# Altium PCB zh2.PcbDoc
Units mil, origin at the board's own origin, x right, y up, seen from the top; angles counter-clockwise.
Board outline 2690 x 1184 mil, 2 copper layers (Top Layer, Bottom Layer); 6 components, 50 nets, 104 pads, 20 vias.
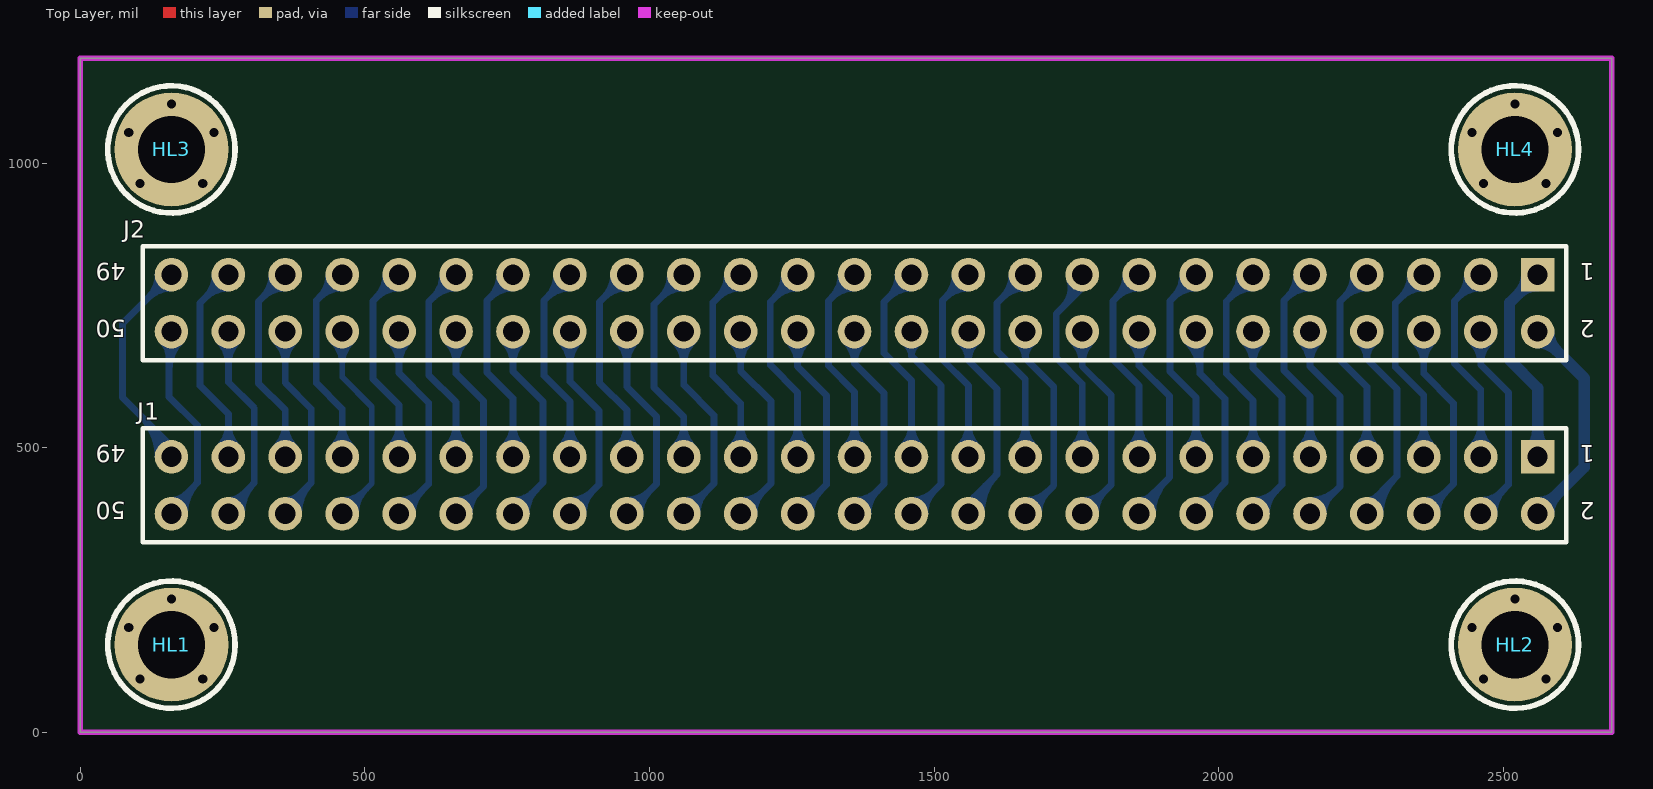
[diagram p0: Top Layer view]
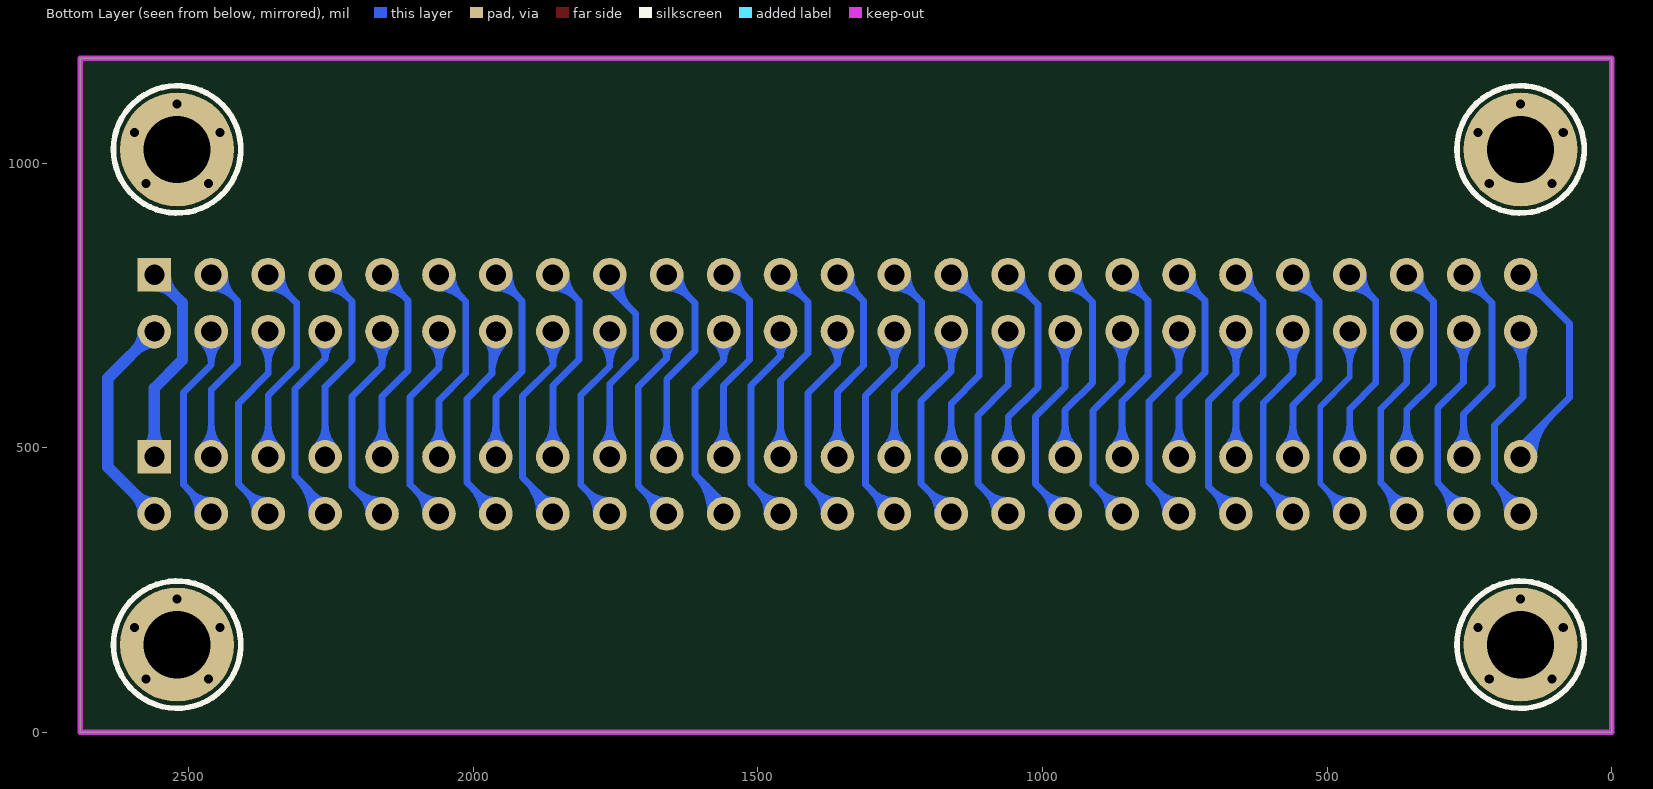
[diagram p1: Bottom Layer view, seen from below]

## Layer stack, top to bottom
Top Layer: signal copper 1.4
Dielectric: dielectric 12.6, FR-4, Dk 4.8
Bottom Layer: signal copper 1.4

## Board outline
0,0 2690,0 2690,1184 0,1184

## Design rules (kind name [scope] priority, off if disabled: settings)
Clearance [All] p1: gap=10
ComponentClearance [All] p1: gap=10 collisioncheckmode=3 verticalgap=10
PolygonConnect [All] p1: connectstyle=Relief reliefconductorwidth=10 reliefentries=4 polygonreliefangle="90 Angle"
RoutingVias [All] p1: holewidth=28 width=50 viastyle="Through Hole" minholewidth=28 minwidth=50 maxholewidth=28 maxwidth=50
SolderMaskExpansion [All] p1: expansion=4
TestPointUsage [All] p1: valid=0 allowmultiple=FALSE
Testpoint [All] p1: side=15 testpointundercomponent=TRUE minsize=40 maxsize=100 preferedsize=60 minholesize=0 maxholesize=40 preferedholesize=32 testpointgrid=1 style=1023 order=0123456789
Width [All] p1: maxlimit=20 minlimit=10 preferedwidth=20
18 further rules are at their usual default settings.

## Components (designator, comment, footprint, x,y, rotation, side; value= is the part's Value field where it differs from the comment)
HL1 "M3" JX002-HOLE-M3 160,154 r0 top
HL2 "M3" JX002-HOLE-M3 2520,154 r0 top
HL3 "M3" JX002-HOLE-M3 160,1024 r0 top
HL4 "M3" JX002-HOLE-M3 2520,1024 r0 top
J1 "2X25/DIP2.54" J089-HDR2X25-DIP2.54MM 2560,484 r180 top
J2 "2X25/DIP2.54" J089-HDR2X25-DIP2.54MM 2560,804 r180 top

## Footprints (in the part's own frame and the unit in brackets; to place one, negate y for a bottom-side part, rotate by r counter-clockwise, add the part's x,y. Pads: shape width x height; smd on the part's side, far side on the other; paste and mask are expansions set on the pad)
J089-HDR2X25-DIP2.54MM [mm] "Connector; Header; 25x2 Position"
  rect 1.5x1.5 hole 0.9: 1(0,0)
  round 1.5 hole 0.9: 2(0,2.54) 3(2.54,0) 4(2.54,2.54) 5(5.08,0) 6(5.08,2.54) 7(7.62,0) 8(7.62,2.54) 9(10.16,0) 10(10.16,2.54) 11(12.7,0) 12(12.7,2.54) 13(15.24,0) 14(15.24,2.54) 15(17.78,0) 16(17.78,2.54) 17(20.32,0) 18(20.32,2.54) 19(22.86,0) 20(22.86,2.54) 21(25.4,0) 22(25.4,2.54) 23(27.94,0) 24(27.94,2.54) 25(30.48,0) 26(30.48,2.54) 27(33.02,0) 28(33.02,2.54) 29(35.56,0) 30(35.56,2.54) 31(38.1,0) 32(38.1,2.54) 33(40.64,0) 34(40.64,2.54) 35(43.18,0) 36(43.18,2.54) 37(45.72,0) 38(45.72,2.54) 39(48.26,0) 40(48.26,2.54) 41(50.8,0) 42(50.8,2.54) 43(53.34,0) 44(53.34,2.54) 45(55.88,0) 46(55.88,2.54) 47(58.42,0) 48(58.42,2.54) 49(60.96,0) 50(60.96,2.54)
  silkscreen extent -1.27,-1.27 62.23,3.81
JX002-HOLE-M3 [mm] "安装孔"
  round 5.08 hole 3: 0(0,0)
  silkscreen extent -2.84,-2.84 2.84,2.84

## Part data
HL1 HL2 HL3 HL4: library part JX002-HOLE-M3, "安装孔"
J1 J2: library part J089-HDR2X25-2.54mm-DIP, "双排直针"

## Via types
v1: diameter 25, hole 16, Top Layer to Bottom Layer, 20 vias

## Nets (pads, with @x,y where several pads share a name; then routed paths per layer and width w, separated by ;. In a path a pad name is that pad's centre, name@x,y a point inside that pad or via, vN(x,y) a via of type N, cw(c..) or ccw(c..) an arc to the next point about the centre after c; other vN are vias at no path point)
3: J1.3 J2.3 | length 536.6
  Bottom Layer w12: J2.3@2436.47,804 cw(c2379.67,804) 2419.84,763.84 cw(c2460,723.67) J2.3@2460,780.47 ; J1.3@2443.36,500.64 ccw(c2403.2,540.8) 2460,540.8 ccw(c2516.8,540.8) J1.3@2476.64,500.64 ; J1.3 2460,602 2414,648 2414,758 J2.3
4: J1.4 J2.4 | length 564.7
  Bottom Layer w12: J2.4@2443.36,687.36 cw(c2403.2,647.2) 2460,647.2 cw(c2516.8,647.2) J2.4@2476.64,687.36 ; J1.4 2460,386 2509,435 2509,597 2460,646 J2.4 ; J1.4@2460,407.53 ccw(c2460,459.5) 2496.75,422.75 ; J1.4@2471.53,384 cw(c2504.19,384) 2481.09,407.09 ; J1.4@2483.53,384 cw(c2545.16,384) 2501.58,427.58
5: J1.5 J2.5 | length 539.9
  Bottom Layer w12: J2.5@2336.47,804 cw(c2279.67,804) 2319.84,763.84 cw(c2360,723.67) J2.5@2360,780.47 ; J1.5@2343.36,500.64 ccw(c2303.2,540.8) 2360,540.8 ccw(c2416.8,540.8) J1.5@2376.64,500.64 ; J1.5 2360,592 2310,642 2310,754 J2.5
6: J1.6 J2.6 | length 541.5
  Bottom Layer w12: J2.6@2343.36,687.36 cw(c2303.2,647.2) 2360,647.2 cw(c2416.8,647.2) J2.6@2376.64,687.36 ; J1.6 2412,436 2412,578 2360,630 J2.6 ; J1.6@2360,407.53 ccw(c2360,464.33) 2400.16,424.16 ccw(c2440.33,384) J1.6@2383.53,384
7: J1.7 J2.7 | length 537.4
  Bottom Layer w12: J2.7@2236.47,804 cw(c2179.67,804) 2219.84,763.84 cw(c2260,723.67) J2.7@2260,780.47 ; J1.7@2243.36,500.64 ccw(c2203.2,540.8) 2260,540.8 ccw(c2316.8,540.8) J1.7@2276.64,500.64 ; J1.7 2260,607 2213,654 2213,757 J2.7
8: J1.8 J2.8 | length 567.4
  Bottom Layer w12: J2.8@2245.59,685.4 cw(c2222.8,656) 2260,656 ; J1.8 2260,397 2313,450 2313,603 2260,656 ; J1.8@2260,407.53 ccw(c2260,432.94) 2277.97,414.97 ; J2.8 2260,656 ; J1.8@2271.53,384 cw(c2330.74,384) 2288.87,425.87 ; J2.8@2274.41,685.4 ccw(c2297.2,656) 2260,656 ; J1.8@2283.53,384 cw(c2371.71,384) 2309.36,446.36
9: J1.9 J2.9 | length 536.2
  Bottom Layer w12: J2.9@2136.47,804 cw(c2079.67,804) 2119.84,763.84 cw(c2160,723.67) J2.9@2160,780.47 ; J1.9@2143.36,500.64 ccw(c2103.2,540.8) 2160,540.8 ccw(c2216.8,540.8) J1.9@2176.64,500.64 ; J1.9 2160,590 2114.47,635.53 2114.47,758.47 J2.9
10: J1.10 J2.10 | length 576.6
  Bottom Layer w12: J2.10@2143.36,687.36 cw(c2103.2,647.2) 2160,647.2 cw(c2216.8,647.2) J2.10@2176.64,687.36 ; J1.10 2165,384 2213,432 2213,590 2160,643 J2.10 ; J1.10@2160,395.53 ccw(c2160,435.43) 2188.21,407.21 ; J1.10@2160,407.53 ccw(c2160,476.4) 2208.7,427.7 ; J1.10@2183.53,384 cw(c2228.26,384) 2196.63,415.63
11: J1.11 J2.11 | length 537.4
  Bottom Layer w12: J2.11@2036.47,804 cw(c1979.67,804) 2019.84,763.84 cw(c2060,723.67) J2.11@2060,780.47 ; J1.11@2043.36,500.64 ccw(c2003.2,540.8) 2060,540.8 ccw(c2116.8,540.8) J1.11@2076.64,500.64 ; J1.11 2060,583 2013,630 2013,757 J2.11
12: J1.12 J2.12 | length 540.7
  Bottom Layer w12: J2.12@2043.36,687.36 cw(c2003.2,647.2) 2060,647.2 cw(c2116.8,647.2) J2.12@2076.64,687.36 ; J1.12 2111,435 2111,589 2060,640 J2.12 ; J1.12@2060,407.53 ccw(c2060,464.33) 2100.16,424.16 ccw(c2140.33,384) J1.12@2083.53,384
13: J1.13 J2.13 | length 536.6
  Bottom Layer w12: J2.13@1936.47,804 cw(c1879.67,804) 1919.84,763.84 cw(c1960,723.67) J2.13@1960,780.47 ; J1.13@1943.36,500.64 ccw(c1903.2,540.8) 1960,540.8 ccw(c2016.8,540.8) J1.13@1976.64,500.64 ; J1.13 1960,588 1914,634 1914,758 J2.13
14: J1.14 J2.14 | length 610.8
  Bottom Layer w12: J2.14@1943.36,687.36 cw(c1886.3,630.3) 1967,630.3 ; J2.14@1951.85,695.85 cw(c1915.27,659.27) 1967,659.27 ; J1.14 1960,388 2011,439 2011,586 1967,630 1967,697 J2.14 ; J1.14@1960,407.53 ccw(c1960,454.67) 1993.34,421.34 ; 1967,664.1 cw(c1999.9,664.1) J2.14@1976.64,687.36 ; J1.14@1971.53,384 cw(c2009.01,384) 1982.51,410.51 ; J1.14@1983.53,384 cw(c2049.98,384) 2002.99,430.99
15: J1.15 J2.15 | length 536.6
  Bottom Layer w12: J2.15@1836.47,804 cw(c1779.67,804) 1819.84,763.84 cw(c1860,723.67) J2.15@1860,780.47 ; J1.15@1843.36,500.64 ccw(c1803.2,540.8) 1860,540.8 ccw(c1916.8,540.8) J1.15@1876.64,500.64 ; J1.15 1860,609 1814,655 1814,758 J2.15
16: J1.16 J2.16 | length 585.1
  Bottom Layer w12: J2.16@1843.36,687.36 cw(c1803.2,647.2) 1860,647.2 cw(c1916.8,647.2) J2.16@1876.64,687.36 ; J1.16 1860,395 1913,448 1913,591 1860,644 J2.16 ; J1.16@1860,407.53 ccw(c1860,437.77) 1881.39,416.39 ; J1.16@1871.53,384 cw(c1925.91,384) 1887.46,422.46 ; J1.16@1883.53,384 cw(c1966.88,384) 1907.94,442.94
17: J1.17 J2.17 | length 575.6
  Bottom Layer w12: 1725.97,746.97 ccw(c1691.71,781.24) J2.17@1737.68,796.56 ; 1739.7,760.7 ccw(c1712.31,788.1) J2.17@1749.06,800.35 ; J1.17@1743.36,500.64 ccw(c1703.2,540.8) 1760,540.8 ccw(c1816.8,540.8) J1.17@1776.64,500.64 ; 1753.43,774.43 ccw(c1732.9,794.97) J2.17@1760.45,804.15 ; J1.17 1760,611.89 1714.47,657.41 1714.47,735.47 1760,781 J2.17
18: J1.18 J2.18 | length 540.7
  Bottom Layer w12: J2.18@1743.36,687.36 cw(c1703.2,647.2) 1760,647.2 cw(c1816.8,647.2) J2.18@1776.64,687.36 ; J1.18 1811,435 1811,592 1760,643 J2.18 ; J1.18@1760,407.53 ccw(c1760,464.33) 1800.16,424.16 ccw(c1840.33,384) J1.18@1783.53,384
19: J1.19 J2.19 | length 539.9
  Bottom Layer w12: J2.19@1636.47,804 cw(c1579.67,804) 1619.84,763.84 cw(c1660,723.67) J2.19@1660,780.47 ; J1.19@1643.36,500.64 ccw(c1603.2,540.8) 1660,540.8 ccw(c1716.8,540.8) J1.19@1676.64,500.64 ; J1.19 1660,620 1610,670 1610,754 J2.19
20: J1.20 J2.20 | length 516
  Bottom Layer w12: J2.20@1645.9,685.16 cw(c1624.82,657) 1660,657 ; J1.20 1710,434 1710,607 1660,657 ; J1.20@1660,407.53 ccw(c1660,464.33) 1700.16,424.16 ccw(c1740.33,384) J1.20@1683.53,384 ; J2.20 1660,657 ; J2.20@1674.1,685.16 ccw(c1695.18,657) 1660,657
21: J1.21 J2.21 | length 536.2
  Bottom Layer w12: J2.21@1536.47,804 cw(c1479.67,804) 1519.84,763.84 cw(c1560,723.67) J2.21@1560,780.47 ; J1.21@1543.36,500.64 ccw(c1503.2,540.8) 1560,540.8 ccw(c1616.8,540.8) J1.21@1576.64,500.64 ; J1.21 1560,609 1514.47,654.53 1514.47,758.47 J2.21
22: J1.22 J2.22 | length 599.6
  Bottom Layer w12: J2.22@1544.73,686.1 cw(c1516.49,653) 1560,653 ; J1.22@1559.53,383.98 cw(c1600.03,385.7) 1571.37,414.37 ; J1.22 1560,403 1610,453 ; J2.22 1560,653 ; J1.22@1571.52,384.49 cw(c1637.09,387.27) 1590.68,433.68 ; J2.22@1575.27,686.1 ccw(c1603.51,653) 1560,653 ; J1.22@1583.51,385 cw(c1674.15,388.85) 1610,453 ; 1560,653 1610,603 1610,453
23: J1.23 J2.23 | length 538.2
  Bottom Layer w12: J2.23@1436.47,804 cw(c1379.67,804) 1419.84,763.84 cw(c1460,723.67) J2.23@1460,780.47 ; J1.23@1443.36,500.64 ccw(c1403.2,540.8) 1460,540.8 ccw(c1516.8,540.8) J1.23@1476.64,500.64 ; J1.23 1460,618 1412,666 1412,756 J2.23
24: J1.24 J2.24 | length 507.4
  Bottom Layer w12: J2.24@1447.31,684.19 cw(c1432.47,661) 1460,661 ; J1.24 1512,436 1512,609 1460,661 ; J1.24@1460,407.53 ccw(c1460,464.33) 1500.16,424.16 ccw(c1540.33,384) J1.24@1483.53,384 ; J2.24 1460,661 ; J2.24@1472.69,684.19 ccw(c1487.53,661) 1460,661
25: J1.25 J2.25 | length 536.6
  Bottom Layer w12: J2.25@1336.47,804 cw(c1279.67,804) 1319.84,763.84 cw(c1360,723.67) J2.25@1360,780.47 ; J1.25@1343.36,500.64 ccw(c1303.2,540.8) 1360,540.8 ccw(c1416.8,540.8) J1.25@1376.64,500.64 ; J1.25 1360,598 1314,644 1314,758 J2.25
26: J1.26 J2.26 | length 539.6
  Bottom Layer w12: J2.26@1343.53,687.2 cw(c1305.13,648) 1360,648 ; J1.26 1412,436 1412,596 1360,648 ; J1.26@1360,407.53 ccw(c1360,464.33) 1400.16,424.16 ccw(c1440.33,384) J1.26@1383.53,384 ; J2.26 1360,648 ; J2.26@1376.47,687.2 ccw(c1414.87,648) 1360,648
27: J1.27 J2.27 | length 538.2
  Bottom Layer w12: J2.27@1236.47,804 cw(c1179.67,804) 1219.84,763.84 cw(c1260,723.67) J2.27@1260,780.47 ; J1.27@1243.36,500.64 ccw(c1203.2,540.8) 1260,540.8 ccw(c1316.8,540.8) J1.27@1276.64,500.64 ; J1.27 1260,597 1212,645 1212,756 J2.27
28: J1.28 J2.28 | length 540.7
  Bottom Layer w12: J2.28@1243.36,687.36 cw(c1203.2,647.2) 1260,647.2 cw(c1316.8,647.2) J2.28@1276.64,687.36 ; J1.28 1311,435 1311,592 1260,643 J2.28 ; J1.28@1260,407.53 ccw(c1260,464.33) 1300.16,424.16 ccw(c1340.33,384) J1.28@1283.53,384
29: J1.29 J2.29 | length 539
  Bottom Layer w12: J2.29@1136.47,804 cw(c1079.67,804) 1119.84,763.84 cw(c1160,723.67) J2.29@1160,780.47 ; J1.29@1143.36,500.64 ccw(c1103.2,540.8) 1160,540.8 ccw(c1216.8,540.8) J1.29@1176.64,500.64 ; J1.29 1160,578 1111,627 1111,755 J2.29
30: J1.30 J2.30 | length 542.4
  Bottom Layer w12: J2.30@1143.36,687.36 cw(c1103.2,647.2) 1160,647.2 cw(c1216.8,647.2) J2.30@1176.64,687.36 ; J1.30 1213,437 1213,582 1160,635 J2.30 ; J1.30@1160,407.53 ccw(c1160,464.33) 1200.16,424.16 ccw(c1240.33,384) J1.30@1183.53,384
31: J1.31 J2.31 | length 541.5
  Bottom Layer w12: J2.31@1036.47,804 cw(c979.67,804) 1019.84,763.84 cw(c1060,723.67) J2.31@1060,780.47 ; J1.31@1043.36,500.64 ccw(c1003.2,540.8) 1060,540.8 ccw(c1116.8,540.8) J1.31@1076.64,500.64 ; J1.31 1060,554 1008,606 1008,752 J2.31
32: J1.32 J2.32 | length 542.4
  Bottom Layer w12: J2.32@1043.36,687.36 cw(c1003.2,647.2) 1060,647.2 cw(c1116.8,647.2) J2.32@1076.64,687.36 ; J1.32 1113,437 1113,557 1060,610 J2.32 ; J1.32@1060,407.53 ccw(c1060,464.33) 1100.16,424.16 ccw(c1140.33,384) J1.32@1083.53,384
33: J1.33 J2.33 | length 538.2
  Bottom Layer w12: J2.33@936.47,804 cw(c879.67,804) 919.84,763.84 cw(c960,723.67) J2.33@960,780.47 ; J1.33@943.36,500.64 ccw(c903.2,540.8) 960,540.8 ccw(c1016.8,540.8) J1.33@976.64,500.64 ; J1.33 960,566 912,614 912,756 J2.33
34: J1.34 J2.34 | length 541.5
  Bottom Layer w12: J2.34@943.36,687.36 cw(c903.2,647.2) 960,647.2 cw(c1016.8,647.2) J2.34@976.64,687.36 ; J1.34 1012,436 1012,555 960,607 J2.34 ; J1.34@960,407.53 ccw(c960,464.33) 1000.16,424.16 ccw(c1040.33,384) J1.34@983.53,384
35: J1.35 J2.35 | length 536.2
  Bottom Layer w12: J2.35@836.47,804 cw(c779.67,804) 819.84,763.84 cw(c860,723.67) J2.35@860,780.47 ; J1.35@843.36,500.64 ccw(c803.2,540.8) 860,540.8 ccw(c916.8,540.8) J1.35@876.64,500.64 ; J1.35 860,581 814.47,626.53 814.47,758.47 J2.35
36: J1.36 J2.36 | length 540.7
  Bottom Layer w12: J2.36@843.36,687.36 cw(c803.2,647.2) 860,647.2 cw(c916.8,647.2) J2.36@876.64,687.36 ; J1.36 911,435 911,565 860,616 J2.36 ; J1.36@860,407.53 ccw(c860,464.33) 900.16,424.16 ccw(c940.33,384) J1.36@883.53,384
37: J1.37 J2.37 | length 536.2
  Bottom Layer w12: J2.37@736.47,804 cw(c679.67,804) 719.84,763.84 cw(c760,723.67) J2.37@760,780.47 ; J1.37@743.36,500.64 ccw(c703.2,540.8) 760,540.8 ccw(c816.8,540.8) J1.37@776.64,500.64 ; J1.37 760,586.89 714.47,632.41 714.47,758.47 J2.37
38: J1.38 J2.38 | length 568
  Bottom Layer w12: J2.38@743.36,687.36 cw(c703.2,647.2) 760,647.2 cw(c816.8,647.2) J2.38@776.64,687.36 ; J1.38 760,386 813,439 813,581 760,634 J2.38 ; J1.38@760,407.53 ccw(c760,459.5) 796.75,422.75 ; J1.38@771.53,384 cw(c804.19,384) 781.09,407.09 ; J1.38@783.53,384 cw(c845.16,384) 801.58,427.58
39: J1.39 J2.39 | length 538.2
  Bottom Layer w12: J2.39@636.47,804 cw(c579.67,804) 619.84,763.84 cw(c660,723.67) J2.39@660,780.47 ; J1.39@643.36,500.64 ccw(c603.2,540.8) 660,540.8 ccw(c716.8,540.8) J1.39@676.64,500.64 ; J1.39 660,580 612,628 612,756 J2.39
40: J1.40 J2.40 | length 538.2
  Bottom Layer w12: J2.40@643.36,687.36 cw(c603.2,647.2) 660,647.2 cw(c716.8,647.2) J2.40@676.64,687.36 ; J1.40 708,432 708,582 660,630 J2.40 ; J1.40@660,407.53 ccw(c660,464.33) 700.16,424.16 ccw(c740.33,384) J1.40@683.53,384
41: J1.41 J2.41 | length 536.6
  Bottom Layer w12: J2.41@536.47,804 cw(c479.67,804) 519.84,763.84 cw(c560,723.67) J2.41@560,780.47 ; J1.41@543.36,500.64 ccw(c503.2,540.8) 560,540.8 ccw(c616.8,540.8) J1.41@576.64,500.64 ; J1.41 560,575 514,621 514,758 J2.41
42: J1.42 J2.42 | length 541.5
  Bottom Layer w12: J2.42@543.36,687.36 cw(c503.2,647.2) 560,647.2 cw(c616.8,647.2) J2.42@576.64,687.36 ; J1.42 612,436 612,579 560,631 J2.42 ; J1.42@560,407.53 ccw(c560,464.33) 600.16,424.16 ccw(c640.33,384) J1.42@583.53,384
43: J1.43 J2.43 | length 536.2
  Bottom Layer w12: J2.43@436.47,804 cw(c379.67,804) 419.84,763.84 cw(c460,723.67) J2.43@460,780.47 ; J1.43@443.36,500.64 ccw(c403.2,540.8) 460,540.8 ccw(c516.8,540.8) J1.43@476.64,500.64 ; J1.43 460,568 414.47,613.53 414.47,758.47 J2.43
44: J1.44 J2.44 | length 659.3
  Bottom Layer w10: J2.44@442.66,686.66 cw(c400.79,644.79) 460,644.79 cw(c519.21,644.79) J2.44@477.34,686.66 ; J2.44@449.73,693.73 cw(c424.93,668.93) 460,668.93 cw(c495.07,668.93) J2.44@470.27,693.73 ; J1.44 460,385 512,437 512,572 460,624 J2.44 ; J1.44@460,398.53 ccw(c460,431.19) 483.09,408.09 ; J1.44@460,408.53 ccw(c460,465.33) 500.16,425.16 ; J1.44@474.53,384 cw(c512.01,384) 485.51,410.51 ; J1.44@484.53,384 cw(c546.16,384) 502.58,427.58
45: J1.45 J2.45 | length 537.4
  Bottom Layer w12: J2.45@336.47,804 cw(c279.67,804) 319.84,763.84 cw(c360,723.67) J2.45@360,780.47 ; J1.45@343.36,500.64 ccw(c303.2,540.8) 360,540.8 ccw(c416.8,540.8) J1.45@376.64,500.64 ; J1.45 360,566 313,613 313,757 J2.45
46: J1.46 J2.46 | length 572.6
  Bottom Layer w12: J2.46@343.36,687.36 cw(c303.2,647.2) 360,647.2 cw(c416.8,647.2) J2.46@376.64,687.36 ; J1.46 360,392.94 405.53,438.47 405.53,568.47 360,614 J2.46 ; J1.46@360,407.53 ccw(c360,442.73) 384.89,417.84 ; J1.46@371.53,384.16 cw(c419,384.8) 385.43,418.37 ; J1.46@383.53,384.32 cw(c458.65,385.34) 405.52,438.47
47: J1.47 J2.47 | length 539.9
  Bottom Layer w12: J2.47@236.47,804 cw(c179.67,804) 219.84,763.84 cw(c260,723.67) J2.47@260,780.47 ; J1.47@243.36,500.64 ccw(c203.2,540.8) 260,540.8 ccw(c316.8,540.8) J1.47@276.64,500.64 ; J1.47 260,559 210,609 210,754 J2.47
48: J1.48 J2.48 | length 572.6
  Bottom Layer w12: J2.48@243.36,687.36 cw(c203.2,647.2) 260,647.2 cw(c316.8,647.2) J2.48@276.64,687.36 ; J1.48 260,392.94 305.53,438.47 305.53,569.47 260,615 J2.48 ; J1.48@260,407.53 ccw(c260,442.73) 284.89,417.84 ; J1.48@271.53,384.16 cw(c319,384.8) 285.43,418.37 ; J1.48@283.53,384.32 cw(c358.65,385.34) 305.52,438.47
49: J1.49 J2.49 | length 648.4
  Bottom Layer w12: 107.11,554.89 cw(c36.22,484) J1.49@136.47,484 ; 127.59,534.41 cw(c77.19,484) J1.49@148.47,484 ; J2.49@136.47,804 cw(c79.67,804) 119.84,763.84 cw(c160,723.67) J2.49@160,780.47 ; 148.08,513.92 cw(c118.16,484) J1.49@160.47,484 ; J1.49 160,502 74,588 74,718 J2.49
50: J1.50 J2.50 | length 608.5
  Bottom Layer w12: J2.50@143.36,687.36 cw(c112.86,656.86) 156,656.86 ; 156,637.54 cw(c226.46,637.54) J2.50@176.64,687.36 ; 156,666.51 cw(c197.49,666.51) J2.50@168.15,695.85 ; J1.50 160,392.94 205.53,438.47 205.53,539.47 156,589 156,700 J2.50 ; J1.50@160,407.53 ccw(c160,442.73) 184.89,417.84 ; J1.50@171.53,384.16 cw(c219,384.8) 185.43,418.37 ; J1.50@183.53,384.32 cw(c258.65,385.34) 205.52,438.47
GND: J1.2 J2.2 | length 536
  Bottom Layer w20: J1.2 2642,466 2642,622 J2.2 ; J1.2@2560,403.53 ccw(c2560,450.67) 2593.34,417.34 ccw(c2626.67,384) J1.2@2579.53,384 ; J2.2@2560,684.47 cw(c2560,637.33) 2593.34,670.66 cw(c2626.67,704) J2.2@2579.53,704
VCC: J1.1 J2.1 | length 512.1
  Bottom Layer w12: J2.1@2557,804 J2.1
  Bottom Layer w20: J2.1@2540.47,804 cw(c2493.33,804) 2526.66,770.66 cw(c2560,737.33) J2.1@2560,784.47 ; J1.1@2546.19,497.81 ccw(c2512.86,531.14) 2560,531.14 ccw(c2607.14,531.14) J1.1@2573.81,497.81 ; J1.1 2560,604.94 2510.47,654.47 2510.47,754.47 J2.1
pads on no net: HL1.0 HL2.0 HL3.0 HL4.0
copper on no net:
  other v1: 105,94 215,94 2465,94 2575,94 85,184 235,184 2445,184 2595,184 160,234 2520,234 105,964 215,964 2465,964 2575,964 85,1054 235,1054 2445,1054 2595,1054 160,1104 2520,1104

## Keep-outs
Keep-Out Layer:
  the board outline again, w10

## Dimensions
0,0 to 2690,0 on Bottom Solder
2690,0 to 2690,1184 on Bottom Solder

## Text inside footprints (layer, text, board x,y; h text height)
J1: Top Overlay "2" at 2660,404 h30 r180; Top Overlay "1" at 2660,504 h30 r180; Top Overlay "49" at 80,504 h30 r180; Top Overlay "50" at 80,404 h30 r180
J2: Top Overlay "2" at 2660,724 h30 r180; Top Overlay "1" at 2660,824 h30 r180; Top Overlay "49" at 80,824 h30 r180; Top Overlay "50" at 80,724 h30 r180